# Altium PCB RUDR BOB PCB Jan 11th, 2025.PcbDoc
Units mm, origin at the board's own origin, x right, y up, seen from the top; angles counter-clockwise.
Board outline 79.75 x 100.58 mm, 2 copper layers (Top Layer, Bottom Layer); 62 components, 41 nets, 265 pads, 2 vias.
Unrouted connection lines stored in the file: 102.
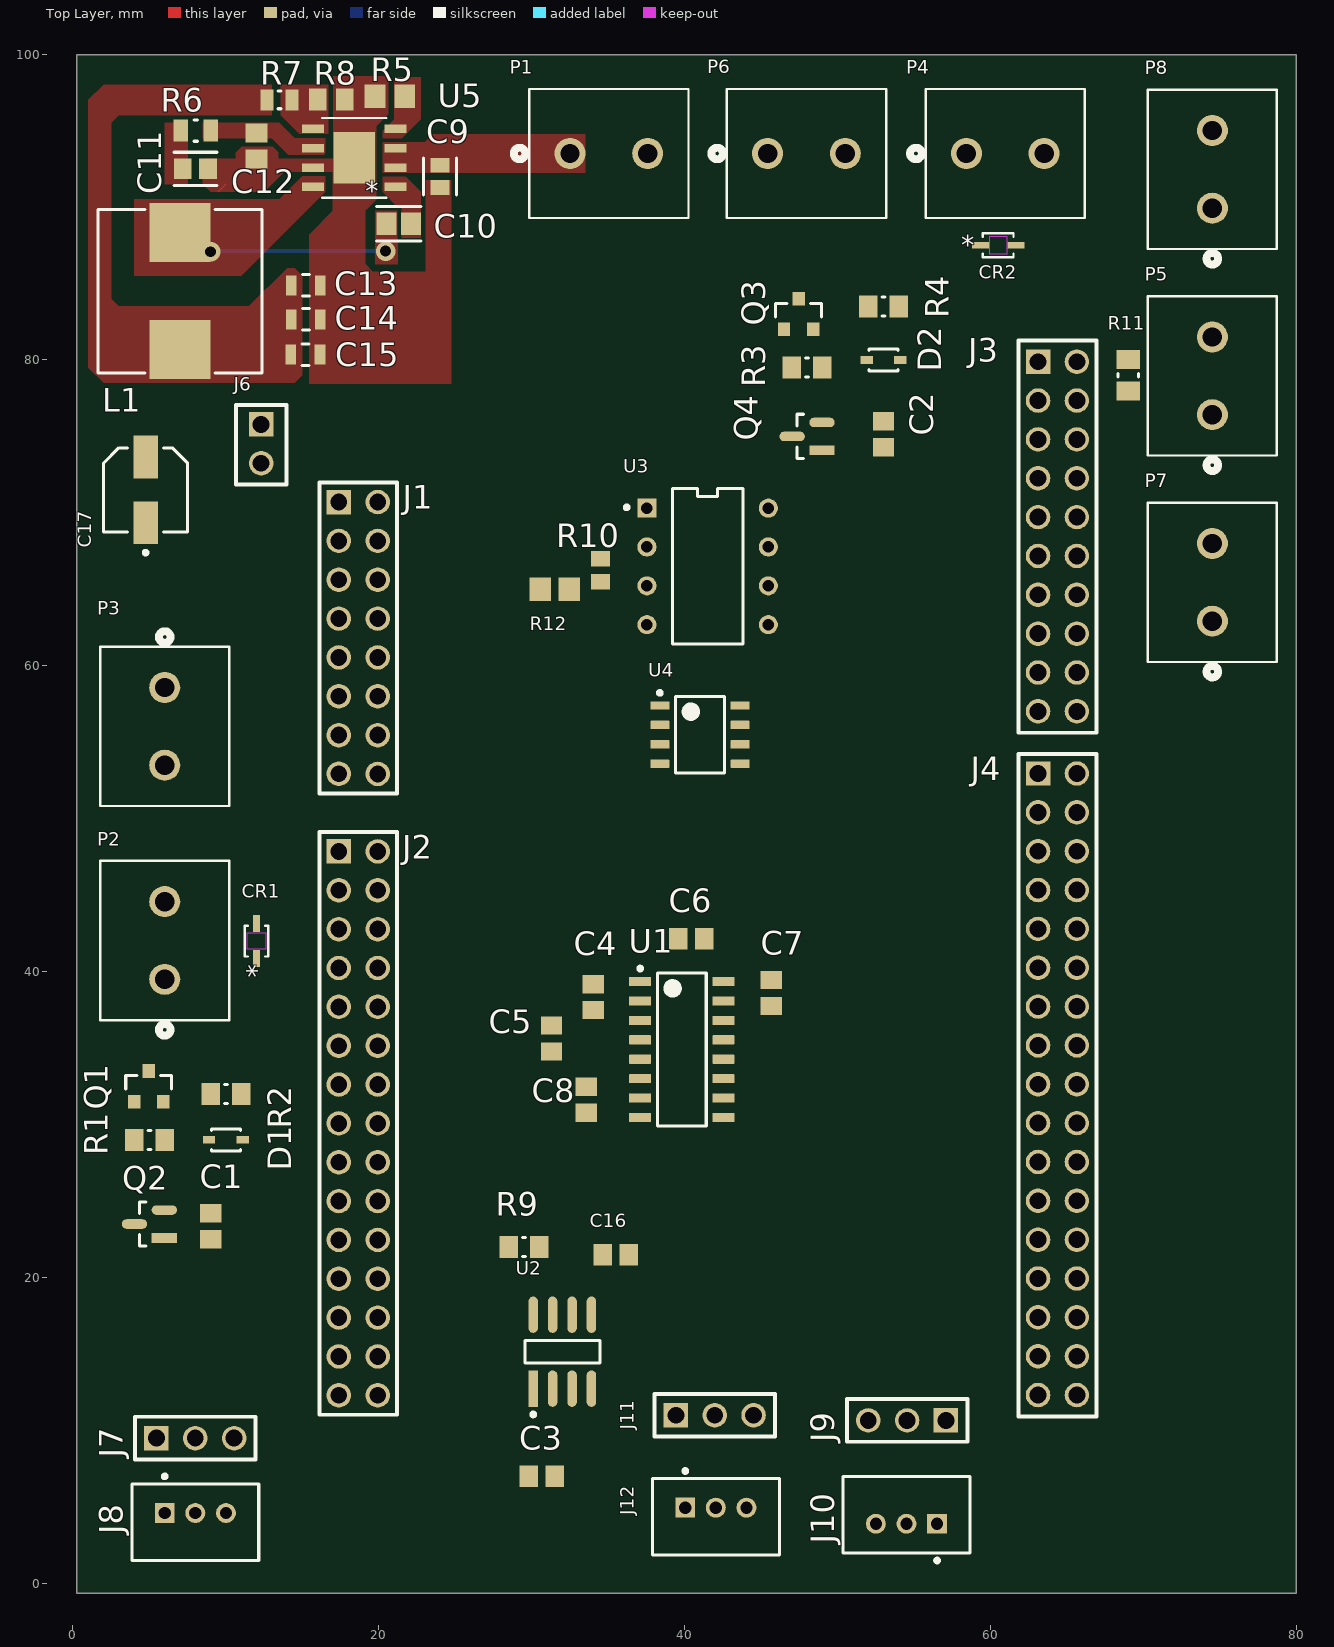
[diagram p0: Top Layer view]
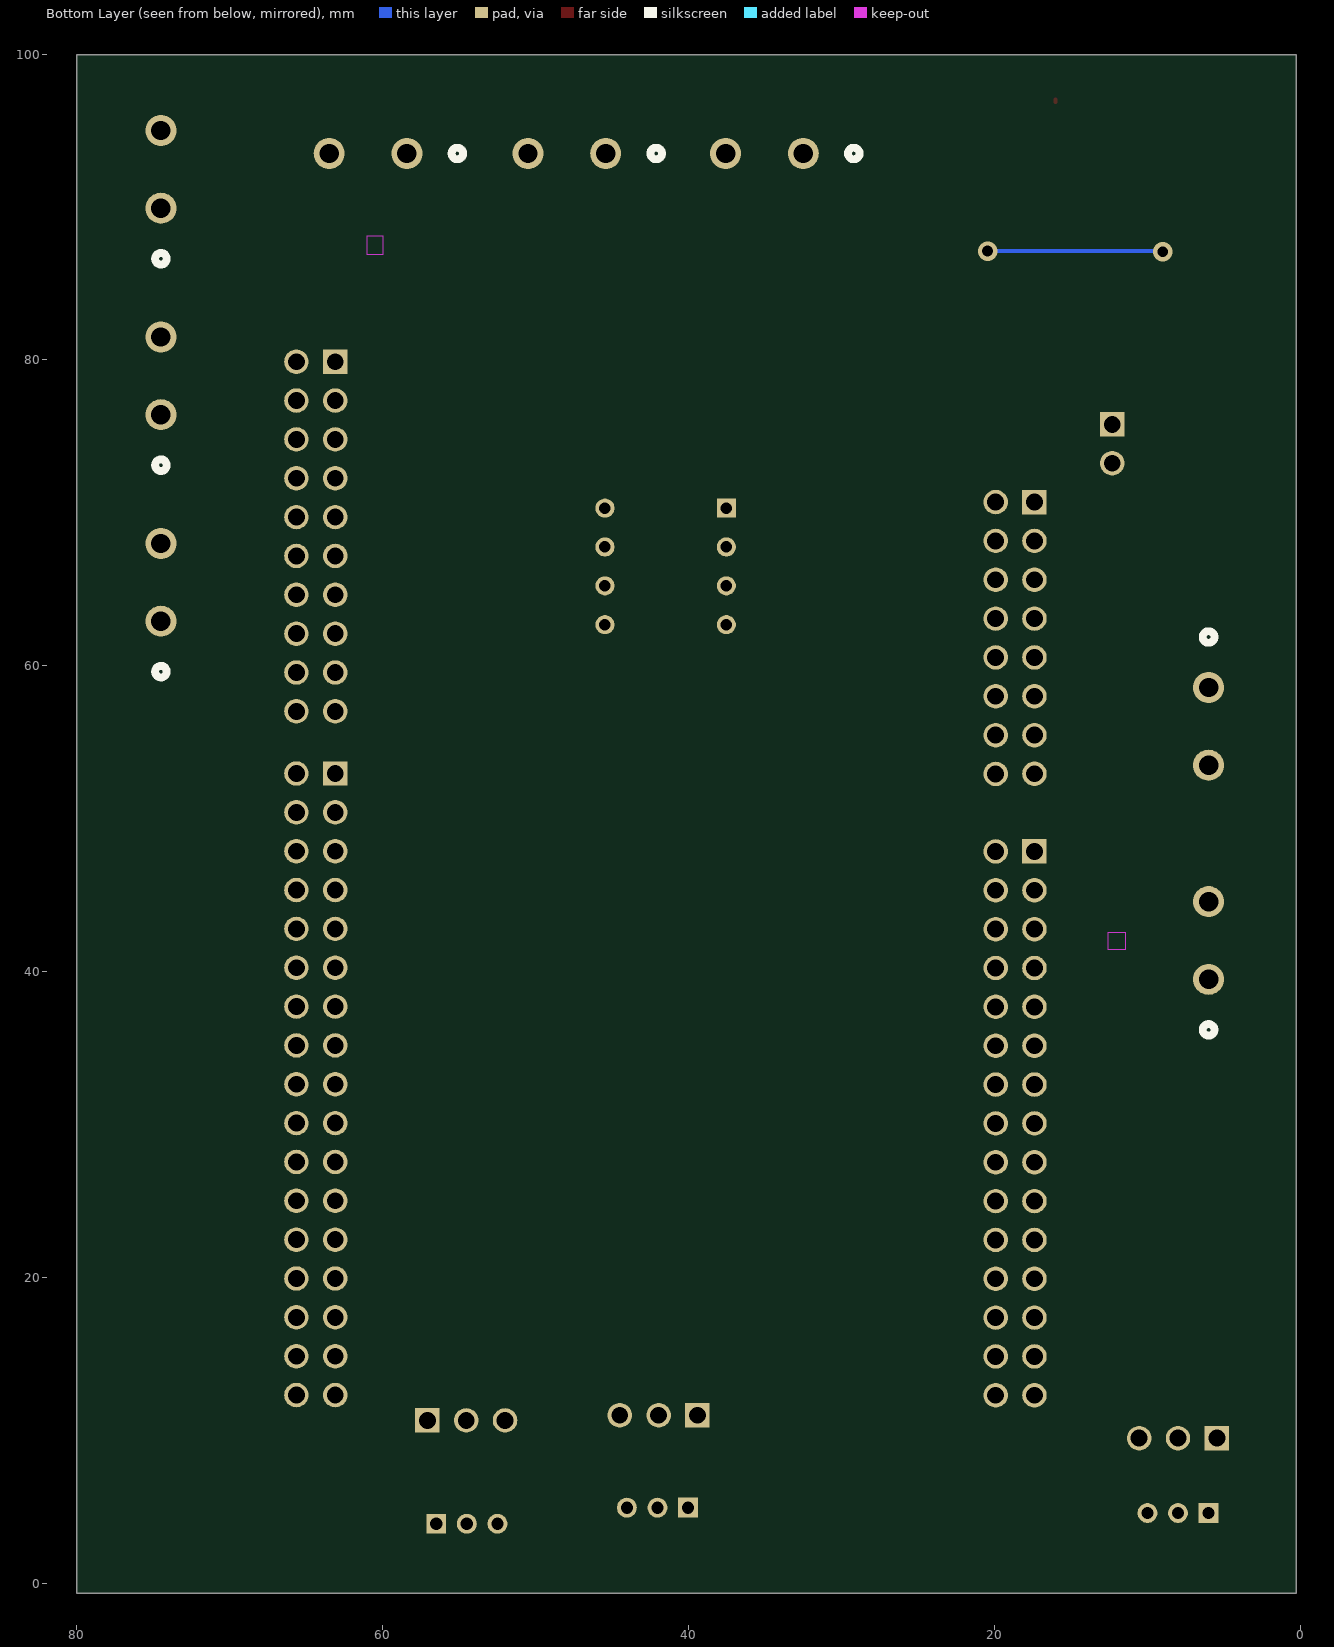
[diagram p1: Bottom Layer view, seen from below]

## Layer stack, top to bottom
Top Solder: solder mask 0.0102, Solder Resist, Dk 3.5
Top Layer: signal copper 0.0356
Dielectric 1: dielectric 0.32, FR-4, Dk 4.8
Bottom Layer: signal copper 0.0356
Bottom Solder: solder mask 0.0102, Solder Resist, Dk 3.5

## Board outline
0.254,-0.635 80,-0.635 80,99.949 0.254,99.949

## Design rules (kind name [scope] priority, off if disabled: settings)
Clearance [All] p1: gap=0.254 ignorepadtopadclearanceinfootprint=FALSE
PolygonConnect [All] p1: connectstyle=Direct reliefconductorwidth=0.254 reliefentries=4 polygonreliefangle="90 Angle" airgapwidth=0.254
RoutingVias [All] p1: holewidth=0.711 width=1.27 viastyle="Through Hole" minholewidth=0.711 minwidth=1.27 maxholewidth=0.711 maxwidth=1.27
SolderMaskExpansion [All] p1: expansion=0.102 istentingtop=FALSE
SupplyNets "Schematic Supply Nets_2" [InNet('GND')] p1: voltage=0.000
SupplyNets "Schematic Supply Nets_1" [InNet('5VIN')] p2: voltage=0.000
SupplyNets "Schematic Supply Nets" [InNet('12VIN')] p3: voltage=0.000
Width [All] p1: maxlimit=0.254 minlimit=0.254 preferedwidth=0.254
30 further rules are at their usual default settings.

## Classes and differential pairs
component class "MainBOB (RUDR) Jan 11th, 2025": * C1 C2 C3 C4 C5 C6 C7 C8 C16 C17 CR1 CR2 D1 D2 J1 J2 J3 J4 J6 J7 J8 J9 J10 J11 J12 P1 P2 P3 P4 P5 P6 P7 P8 Q1 Q2 Q3 Q4 R1 R2 R3 R4 R9 R10 R11 R12 U1 U2 U3 U4
component class "5V_BUCK (RUDR)": * C9 C10 C11 C12 C13 C14 C15 L1 R5 R6 R7 R8 U5

## Components (designator, comment, footprint, x,y, rotation, side; value= is the part's Value field where it differs from the comment)
C1 "0.47 uF" CAPC2013X135X45NL10T25 9,23.35 r270 top
C2 "0.47 uF" CAPC2013X135X45NL10T25 53,75.15 r270 top
C3 "0.1 uF" CAPC2013X135X45NL10T25 30.65,7 r180 top
C4 "0.1 uF" CAPC2013X135X45NL10T25 34.009,38.34 r90 top
C5 "0.47 uF" CAPC2013X135X45NL10T25 31.291,35.634 r90 top
C6 "0.47 uF" CAPC2013X135X45NL10T25 40.424,42.15 r0 top
C7 "0.1 uF" CAPC2013X135X45NL10T25 45.668,38.608 r90 top
C8 "0.47 uF" CAPC2013X135X45NL10T25 33.552,31.623 r90 top
C9 "10 uF" FP-GRM21B-0_1-IPC_C 24,92 r270 top
C10 "100 nF" FP-0805-L_2_01_0_2-W_1_25-IPC_B 21.292,88.898 r180 top
C11 "3.3 nF" FP-GRM216-0_1-IPC_B 8,92.5 r0 top
C12 "47 pF" CAPC2013X135X50NL15T20 12,94 r90 top
C13 "22 uF" FP-GRM21B-0_15-MFG 15.225,84.875 r0 top
C14 "22 uF" FP-GRM21B-0_15-MFG 15.225,82.65 r0 top
C15 "22 uF" FP-GRM21B-0_15-MFG 15.2,80.35 r0 top
C16 "0.1 uF" CAPC2013X135X45NL10T25 35.5,21.5 r0 top
C17 "10uF" FP-FKC-MFG 4.75,71.5 r90 top
CR1 "CUS10S30,H3FT" USC_TOS 12,42 r90 top
CR2 "CUS10S30,H3FT" USC_TOS 60.5,87.5 r0 top
D1 "CDSOD323-T05SC" FP-SOD-323-CA-MFG 10,29 r0 top
D2 "CDSOD323-T05SC" FP-SOD-323-CA-MFG 53,80 r180 top
J1 "CN8 CONN HDR 16POS" CN8_8X2_PADS 17.384,70.708 r0 top
J2 "CN9 CONN HDR 30POS" CN9_15X2_PADS 17.384,47.861 r0 top
J3 "CN7 CONN HDR 20POS" CN7_10X2_PADS 63.104,79.883 r0 top
J4 "CN10 CONN HDR 34POS" CN10_17X2_PADS 63.104,52.959 r0 top
J6 "5V_EXT" 5V_EXT 12.304,75.788 r0 top
J7 "CN 3PIN" "3X1 CON" 5.46,9.5 r90 top
J8 "440054-3" FP-440054-3-MFG 8,4 r180 top
J9 "CN 3PIN" "3X1 CON" 57.081,10.659 r270 top
J10 "440054-3" FP-440054-3-MFG 54.5,4.5 r0 top
J11 "CN 3PIN" "3X1 CON" 39.42,11 r90 top
J12 "440054-3" FP-440054-3-MFG 42.035,4.354 r180 top
L1 "5.5 uH" WE-HCI_1050 7,84.5 r0 top
P1 "282837-2" 282837-2_TYC 32.5,93.5 r0 top
P2 "282837-2" 282837-2_TYC 6,39.5 r90 top
P3 "282837-2" 282837-2_TYC 6,58.58 r270 top
P4 "282837-2" 282837-2_TYC 58.42,93.5 r0 top
P5 "282837-2" 282837-2_TYC 74.5,76.42 r90 top
P6 "282837-2" 282837-2_TYC 45.42,93.5 r0 top
P7 "282837-2" 282837-2_TYC 74.5,62.92 r90 top
P8 "282837-2" 282837-2_TYC 74.5,89.92 r90 top
Q1 "DMG2301L-7" FP-SOT23-MFG 4.95,32.5 r90 top
Q2 "MMBT3904-7-F" FP-SOT23-IPC_A 5,23.5 r180 top
Q3 "DMG2301L-7" FP-SOT23-MFG 47.45,83 r90 top
Q4 "MMBT3904-7-F" FP-SOT23-IPC_A 48,75 r180 top
R1 "200k" RESC2013X60X35ML10T20 5,29 r180 top
R2 "200k" RESC2013X60X35ML10T20 10,32 r0 top
R3 "200k" RESC2013X60X35ML10T20 48,79.5 r180 top
R4 "200k" RESC2013X60X35ML10T20 53,83.5 r0 top
R5 "200k" RESC2013X70X40ML20T20 20.725,97.25 r0 top
R6 "14k" FP-CRCW0805-e3-MFG 8.025,95 r180 top
R7 "115k" RESC2013X50X30LL20T20 13.5,97 r180 top
R8 "22.1k" RESC2013X70X40NL20T20 16.891,97.026 r180 top
R9 "120" RESC2013X60X35ML10T20 29.5,22 r0 top
R10 "10K" RESC2013X60X40LL20T25_A 34.5,66.25 r270 top
R11 "CRCW08055K00FKTA" RESC2013X50X30ML20T20 69,79 r90 top
R12 "22k" RESC2013X60X40ML20T25 31.5,65 r0 top
U1 "MAX3232EIDR" D0016A_N 39.808,34.911 r0 top
U2 "MCP2562FDT-H/SN" FP-C04-057-SN-IPC_A 31.998,15.156 r90 top
U3 "LM311P" FP-P0008A-MFG 41.5,66.5 r0 top
U4 "UA741CDR" D0008A_L 41,55.5 r0 top
U5 "AP64350SP-13" SO-8EP_DIO 18.39,93.216 r180 top

## Footprints (in the part's own frame and the unit in brackets; to place one, negate y for a bottom-side part, rotate by r counter-clockwise, add the part's x,y. Pads: shape width x height; smd on the part's side, far side on the other; paste and mask are expansions set on the pad)
"3X1 CON" [mm]
  rect 1.6x1.6 hole 1.1: 1(0,0)
  round 1.6 hole 1.1: 2(0,-2.54) 3(0,-5.08)
  silkscreen extent -1.4,-6.48 1.4,1.4
5V_EXT [mm]
  rect 1.6x1.6 hole 1.1: 1(0,0)
  round 1.6 hole 1.1: 2(0,-2.54)
  silkscreen extent -1.65,-3.94 1.65,1.27
282837-2_TYC [mil]
  round 80 / inner round 60 / far side round 80 hole 50 paste-99999 mask-40: 1(0,0) 2(200,0)
  silkscreen extent -145,-166 305,166
CAPC2013X135X45NL10T25 [mm] "Chip Capacitor, 2-Leads, Body 2.10x1.35mm, IPC Medium Density"
  rect 1.2x1.4 smd: 1(-0.85,0) 2(0.85,0)
  body extent -1.05,-0.67 1.05,0.67, height 1.35
CAPC2013X135X50NL15T20 [mm] "Chip Capacitor, 2-Leads, Body 2.00x1.25mm, IPC Medium Density"
  rect 1.25x1.45 smd: 1(-0.85,0) 2(0.85,0)
  body extent -1.08,-0.7 1.07,0.7, height 1.35
CN7_10X2_PADS [mm]
  rect 1.6x1.6 hole 1.1: 1(0,0)
  round 1.6 hole 1.1: 2(2.54,0) 3(0,-2.54) 4(2.54,-2.54) 5(0,-5.08) 6(2.54,-5.08) 7(0,-7.62) 8(2.54,-7.62) 9(0,-10.16) 10(2.54,-10.16) 11(0,-12.7) 12(2.54,-12.7) 13(0,-15.24) 14(2.54,-15.24) 15(0,-17.78) 16(2.54,-17.78) 17(0,-20.32) 18(2.54,-20.32) 19(0,-22.86) 20(2.54,-22.86)
  silkscreen extent -1.27,-24.26 3.81,1.4
CN8_8X2_PADS [mm]
  rect 1.6x1.6 hole 1.1: 1(0,0)
  round 1.6 hole 1.1: 2(2.54,0) 3(0,-2.54) 4(2.54,-2.54) 5(0,-5.08) 6(2.54,-5.08) 7(0,-7.62) 8(2.54,-7.62) 9(0,-10.16) 10(2.54,-10.16) 11(0,-12.7) 12(2.54,-12.7) 13(0,-15.24) 14(2.54,-15.24) 15(0,-17.77) 16(2.54,-17.78)
  silkscreen extent -1.27,-19.05 3.81,1.27
CN9_15X2_PADS [mm]
  rect 1.6x1.6 hole 1.1: 1(0,0)
  round 1.6 hole 1.1: 2(2.54,0) 3(0,-2.54) 4(2.54,-2.54) 5(0,-5.08) 6(2.54,-5.08) 7(0,-7.62) 8(2.54,-7.62) 9(0,-10.16) 10(2.54,-10.16) 11(0,-12.7) 12(2.54,-12.7) 13(0,-15.24) 14(2.54,-15.24) 15(0,-17.78) 16(2.54,-17.78) 17(0,-20.32) 18(2.54,-20.32) 19(0,-22.86) 20(2.54,-22.86) 21(0,-25.4) 22(2.54,-25.4) 23(0,-27.94) 24(2.54,-27.94) 25(0,-30.48) 26(2.54,-30.48) 27(0,-33.02) 28(2.54,-33.02) 29(0,-35.56) 30(2.54,-35.56)
  silkscreen extent -1.27,-36.83 3.81,1.27
CN10_17X2_PADS [mm]
  rect 1.6x1.6 hole 1.1: 1(0,0)
  round 1.6 hole 1.1: 2(2.54,0) 3(0,-2.54) 4(2.54,-2.54) 5(0,-5.08) 6(2.54,-5.08) 7(0,-7.62) 8(2.54,-7.62) 9(0,-10.16) 10(2.54,-10.16) 11(0,-12.7) 12(2.54,-12.7) 13(0,-15.24) 14(2.54,-15.24) 15(0,-17.78) 16(2.54,-17.78) 17(0,-20.32) 18(2.54,-20.32) 19(0,-22.86) 20(2.54,-22.86) 21(0,-25.4) 22(2.54,-25.4) 23(0,-27.94) 24(2.54,-27.94) 25(0,-30.48) 26(2.54,-30.48) 27(0,-33.02) 28(2.54,-33.02) 29(0,-35.56) 30(2.54,-35.56) 31(0,-38.1) 32(2.54,-38.1) 33(0,-40.64) 34(2.54,-40.64)
  silkscreen extent -1.27,-42.04 3.81,1.27
D0008A_L [mm] "SOIC, 8-Leads, Body 5x4mm, Pitch 1.27mm, IPC High Density"
  rrect18% 1.25x0.55 smd: 1(-2.625,1.905) 2(-2.625,0.635) 3(-2.625,-0.635) 4(-2.625,-1.905) 5(2.625,-1.905) 6(2.625,-0.635) 7(2.625,0.635) 8(2.625,1.905)
  silkscreen extent -2.75,-2.5 1.6,2.85, body extent -3,-2.45 3,2.45, height 1.63
D0016A_N [mm] "SOIC, 16-Leads, Body 10x4mm, Pitch 1.27mm, IPC Medium Density"
  rrect17% 1.45x0.6 smd: 1(-2.725,4.445) 2(-2.725,3.175) 3(-2.725,1.905) 4(-2.725,0.635) 5(-2.725,-0.635) 6(-2.725,-1.905) 7(-2.725,-3.175) 8(-2.725,-4.445) 9(2.725,-4.445) 10(2.725,-3.175) 11(2.725,-1.905) 12(2.725,-0.635) 13(2.725,0.635) 14(2.725,1.905) 15(2.725,3.175) 16(2.725,4.445)
  silkscreen extent -2.85,-5 1.6,5.42, body extent -3,-4.95 3,4.95, height 1.59
FP-0805-L_2_01_0_2-W_1_25-IPC_B [mm]
  rect 1.305x1.456 smd paste+0 mask+0: 1(-0.806,0) 2(0.806,0)
  silkscreen extent -1.46,-1.13 1.46,1.13, body extent -1.71,-0.98 1.71,0.98, height 0.25
FP-440054-3-MFG [mm]
  rect 1.3x1.3 hole 0.8 paste-2539.97 mask+0: 1(2,-0.6)
  round 1.3 hole 0.8 paste-2539.97 mask+0: 2(0,-0.6) 3(-2,-0.6)
  silkscreen extent -4.15,-3.12 4.15,2.5, body extent -4.25,-2.6 4.25,2.6, height 0.25
FP-C04-057-SN-IPC_A [mm]
  rect 2.377x0.622 smd paste+0 mask+0: 1(-2.418,1.905)
  rrect100% 2.377x0.622 smd paste+0 mask+0: 2(-2.418,0.635) 3(-2.418,-0.635) 4(-2.418,-1.905) 5(2.418,-1.905) 6(2.418,-0.635) 7(2.418,0.635) 8(2.418,1.905)
  silkscreen extent -4.23,-2.45 0.73,2.45, body extent -4.11,-2.95 4.11,2.95, height 0.25
FP-CRCW0805-e3-MFG [mm]
  rect 0.95x1.45 smd paste+0 mask+0: 1(-0.975,0) 2(0.975,0)
  silkscreen extent -0.13,-0.7 0.13,0.7, body extent -1.55,-0.82 1.55,0.82, height 0.25
FP-FKC-MFG [mm]
  rect 2.8x1.6 smd paste+0 mask+0: 1(-2.15,0) 2(2.15,0)
  silkscreen extent -4.22,-2.75 2.75,2.75, body extent -3.8,-3 3.8,3, height 0.25
FP-GRM21B-0_1-IPC_C [mm]
  rect 0.958x1.262 smd paste+0 mask+0: 1(-0.727,0) 2(0.727,0)
  silkscreen extent -1.21,-1.07 1.21,1.07, body extent -1.31,-0.77 1.31,0.77, height 0.25
FP-GRM21B-0_15-MFG [mm]
  rect 0.7x1.3 smd paste+0 mask+0: 1(-0.95,0) 2(0.95,0)
  silkscreen extent -0.23,-0.7 0.23,0.7, body extent -1.4,-0.8 1.4,0.8, height 0.25
FP-GRM216-0_1-IPC_B [mm]
  rect 1.158x1.361 smd paste+0 mask+0: 1(-0.827,0) 2(0.827,0)
  silkscreen extent -1.41,-1.08 1.41,1.08, body extent -1.66,-0.93 1.66,0.93, height 0.25
FP-P0008A-MFG [mm]
  rect 1.25x1.25 hole 0.75 paste-2539.97 mask+0: 1(-3.97,3.81)
  round 1.25 hole 0.75 paste-2539.97 mask+0: 2(-3.97,1.27) 3(-3.97,-1.27) 4(-3.97,-3.81) 5(3.97,-3.81) 6(3.97,-1.27) 7(3.97,1.27) 8(3.97,3.81)
  silkscreen extent -5.42,-5.08 2.3,5.08, body extent -4.69,-5.18 4.69,5.18, height 0.25
FP-SOD-323-CA-MFG [mm]
  rect 0.8x0.5 smd paste+0 mask+0: 1(-1.1,0) 2(1.1,0)
  silkscreen extent -0.95,-0.72 0.95,0.72, body extent -1.6,-0.82 1.6,0.82, height 0.25
FP-SOT23-IPC_A [mm]
  rect 1.659x0.627 smd paste+0 mask+0: 1(-0.977,0.915)
  rrect100% 1.659x0.627 smd paste+0 mask+0: 2(-0.977,-0.915) 3(0.977,0)
  silkscreen extent 0.23,-1.45 0.65,1.45, body extent -2.31,-1.95 2.31,1.95, height 0.25
FP-SOT23-MFG [mm]
  rect 0.9x0.8 smd paste+0 mask+0: 1(-1,0.95) 2(-1,-0.95) 3(1,0)
  silkscreen extent -0.18,-1.5 0.7,1.5, body extent -1.55,-1.6 1.55,1.6, height 0.25
RESC2013X50X30LL20T20 [mm] "Chip Resistor, 2-Leads, Body 2.00x1.25mm, IPC High Density"
  rect 0.85x1.35 smd: 1(-0.825,0) 2(0.825,0)
  silkscreen extent -0.1,-0.58 0.1,0.58, body extent -1.1,-0.72 1.1,0.72, height 0.5
RESC2013X50X30ML20T20 [mm] "Chip Resistor, 2-Leads, Body 2.00x1.25mm, IPC Low Density"
  rect 1.25x1.55 smd: 1(-1.025,0) 2(1.025,0)
  silkscreen extent -0.1,-0.67 0.1,0.67, body extent -1.1,-0.72 1.1,0.72, height 0.5
RESC2013X60X35ML10T20 [mm] "Chip Resistor, 2-Leads, Body 2.1x1.35mm, IPC Low Density"
  rect 1.2x1.45 smd: 1(-1,0) 2(1,0)
  silkscreen extent -0.1,-0.63 0.1,0.63, body extent -1.05,-0.68 1.05,0.67, height 0.6
RESC2013X60X40LL20T25_A [mm] "Chip Resistor, 2-Leads, Body 2.20x1.35mm, IPC High Density"
  rect 1x1.25 smd: 1(-0.75,0) 2(0.75,0)
  body extent -1.1,-0.67 1.1,0.67, height 0.6
RESC2013X60X40ML20T25 [mm] "Chip Resistor, 2-Leads, Body 2.00x1.25mm, IPC Low Density"
  rect 1.4x1.55 smd: 1(-0.95,0) 2(0.95,0)
  body extent -1.1,-0.72 1.1,0.72, height 0.6
RESC2013X70X40ML20T20 [mm] "Chip Resistor, 2-Leads, Body 2.00x1.25mm, IPC Low Density"
  rect 1.35x1.55 smd: 1(-0.975,0) 2(0.975,0)
  body extent -1.1,-0.72 1.1,0.72, height 0.7
RESC2013X70X40NL20T20 [mm] "Chip Resistor, 2-Leads, Body 2.00x1.25mm, IPC Medium Density"
  rect 1.15x1.45 smd: 1(-0.875,0) 2(0.875,0)
  body extent -1.1,-0.72 1.1,0.72, height 0.7
SO-8EP_DIO [mil]
  rect 56x22 smd paste+0 mask+0: 1(-106,75) 2(-106,25) 3(-106,-25) 4(-106,-75) 5(106,-75) 6(106,-25) 7(106,25) 8(106,75)
  rect 107x132 smd paste-65.5 mask+0: EPAD(0,0)
  silkscreen extent -83,-103 83,103, body extent -120,-97 120,97, height 64
USC_TOS [mm]
  rect 1.111x0.451 smd paste+0 mask+0: 1(-1.15,0) 2(1.15,0)
  Keep-Out Layer region: -0.544,-0.599 -0.544,0.599 0.544,0.599 0.544,-0.599
  silkscreen extent -1,-0.78 1,0.78, body extent -1.35,-0.65 1.35,0.65, height 1.1
WE-HCI_1050 [mm] "SMT Flat Wire High Current Inductor, body 10.2x10.2mm"
  rect 4x3.85 smd: 1(0,3.825) 2(0,-3.825)
  silkscreen extent -5.35,-5.35 5.35,5.35, body extent -5.1,-5.5 5.1,5.5, height 5

## Part data
C1 C2 C3 C4 C5 C6 C7 C8 C16: library part CMP-1662-00015-2, "Chip Capacitor, 4.7 uF, +/- 10%, 16 V, -55 to 85 degC, 0805 (2012 Metric), RoHS, Tape and Reel", Capacitance="4.7 uF", Case Code (Imperial)=0805, Case Code (Metric)=2012, Max Operating Temperature="85 degC", Min Operating Temperature="-55 degC", Package Quantity=3000, PartNumber=GRM21BR61C475KA88L, Tolerance=10%, Type (Capacitors)=X5R, Voltage Rating="16 V", Case\/Package=0805, ComponentLink1Description="Manufacturer URL", ComponentLink1URL=http://www.murata.com/, ComponentLink2Description=Datasheet, ComponentLink2URL=http://search.murata.co.jp/Ceramy/image/img/A01X/G101/ENG/GRM21BR61C475KA88-01.pdf, DatasheetVersion=03/2016, Height="1.25 mm", Length="2 mm", Mount="Surface Mount", Mounting Technology="Surface Mount", PackageDescription="2-Pin Surface Mount Device, Body 2 x 1.25 mm", PackageReference=0805, Packaging="Tape and Reel", Pins=2, Radiation Hardening=No, REACH SVHC="No SVHC", RoHSCompliant=true, Voltage Rating (DC)="16 V", Width="1.25 mm"
C9: library part CMP-2007-03453-2, "Chip Multilayer Ceramic Capacitors for General Purpose, 0805, 10uF, X5R, 15%, 10%, 16V", Capacitance=10uF, Case Code (Imperial)=0805, Case Code (Metric)=2012, Dielectric=X5R, Max Operating Temperature=85°C, Min Operating Temperature=-55°C, Package Quantity=1, Tolerance=10%, Voltage=16V, Case/Package=0805, Depth=1.25mm, Height=1.25mm, Lead Free="Lead Free", Length=2mm, Material=Ceramic, Mount="Surface Mount", Packaging="Tape and Reel", Radiation Hardening=No, REACH SVHC="No SVHC", Termination=SMD/SMT, Thickness=0.053inch, Voltage Rating=16V, Voltage Rating (DC)=16V, Width=1.25mm
C10: library part CMP-2007-04172-2, "Automotive Ceramic Capacitor, 0805, 100nF, 10%, X7R, 15%, 100V", Capacitance=100nF, Case Code (Imperial)=0805, Case Code (Metric)=2012, Dielectric=X7R, Dielectric Material=Ceramic, Max Operating Temperature=125°C, Min Operating Temperature=-55°C, Package Quantity=1, Ratings=AEC-Q200, Tolerance=10%, Voltage=100V, Case/Package=0805, Construction=Flat, Depth=1.25mm, Height=1.4mm, Lead Free="Lead Free", Length=2.01mm, Mount="Surface Mount", Number of Pins=2, Packaging="Tape and Reel", Radiation Hardening=No, REACH SVHC="No SVHC", RoHS Compliant=Yes, Series=-, Termination=SMD/SMT, Thickness=0.055inch, Voltage Rating=100V, Voltage Rating (DC)=100V, Width=0.049inch
C11: library part CMP-2007-00889-2, "Chip Multilayer Ceramic Capacitors for General Purpose, 0805, 3300pF, C0G, 30ppm/°C, 5%, 50V", Capacitance=3.3nF, Case Code (Imperial)=0805, Case Code (Metric)=2012, Dielectric=C0G, Dielectric Material=Ceramic, Insulation Resistance=10GR, Max Operating Temperature=125°C, Min Operating Temperature=-55°C, Package Quantity=1, Temperature Coefficient=30ppm/°C, Tolerance=5%, Voltage=50V, Case/Package=0805, Construction=Flat, Depth=1.25mm, Height=0.6mm, Lead Free="Lead Free", Length=2mm, Material=Ceramic, Mount="Surface Mount", Number of Pins=2, Packaging="Tape and Reel", REACH SVHC="No SVHC", RoHS Compliant=Yes, Series=GRM, Size=0.6mm, Termination=SMD/SMT, Thickness=0.028inch, Voltage Rating=50V, Voltage Rating (DC)=50V, Width=0.049inch
C12: library part CMP-1036-01617-2, Manufacturer=Vitramon, Part Number=VJ0805A470JXACW1BC
C13 C14 C15: library part CMP-2007-03385-2, "Chip Multilayer Ceramic Capacitors for General Purpose, 0805, 22uF, X5R, 15%, 20%, 6.3V", Capacitance=22uF, Case Code (Imperial)=0805, Case Code (Metric)=2012, Dielectric=X5R, Max Operating Temperature=85°C, Min Operating Temperature=-55°C, Package Quantity=1, Tolerance=20%, Voltage=6.3V, Case/Package=0805, Depth=1.25mm, Height=1.25mm, Lead Free="Lead Free", Length=2mm, Material=Ceramic, Mount="Surface Mount", Packaging="Tape and Reel", Radiation Hardening=No, REACH SVHC="No SVHC", Termination=SMD/SMT, Thickness=0.053inch, Voltage Rating=6.3V, Voltage Rating (DC)=6.3V, Width=0.049inch
C17: library part CMP-05427-000030-1, "CAP ALUM 10UF 20% 50V SMD", Case/Package=Radial, Dielectric Material=Aluminium, ESR (Equivalent Series Resistance)=1.52R, Leakage Current=3uA, Max Operating Temperature=105°C, Min Operating Temperature=-55°C, Package Quantity=1000, Ripple Current=85mA, Tolerance=20%, Voltage=50V, Capacitance=10uF, Construction=Cylindrical, Contact Plating=Tin, Diameter=5mm, Height=5.8mm, Height - Seated (Max)=0.228inch, Impedance=1.52R, Lead Free="Lead Free", Length=5.8mm, Life (Hours)=2000Hour, Material=Aluminium, Mount="Surface Mount", Number of Pins=2, Packaging="Tape and Reel", Radiation Hardening=No, REACH SVHC="No SVHC", Ripple Current (AC)=85mA, RoHS Compliant=Yes, Series=FK, Termination=SMD/SMT, Voltage Rating=50V, Voltage Rating (DC)=50V, Width=6.5mm
CR1 CR2: "No Description Available", Mfr_Name="Toshiba Electronic Devices & Storage Corp."
D1 D2: library part CMP-07401-000040-1, "TVS DIODE 5VWM 14.5VC SOD323", Breakdown Voltage=6V, Capacitance=350pF, Clamping Voltage=13.5V, Leakage Current=10uA, Max Operating Temperature=150°C, Max Power Dissipation=400W, Max Surge Current=28A, Min Operating Temperature=-55°C, Operating Supply Voltage=5V, Package Quantity=3000, Peak Pulse Power=500W, Power Line Protection=No, Resistor Type=Zener, Test Current=1mA, Contact Plating=Tin, Depth=1.45mm, Diode Type=ZENER, Direction=Bidirectional, Element Configuration=Single, Length=1.9mm, Max Breakdown Voltage=6V, Min Breakdown Voltage=6V, Mount="Surface Mount", Number of Bidirectional Channels=1, Number Of Channels=1, Number of Elements=1, Number of Pins=2, Packaging="Tape and Reel", Peak Pulse Current=28A, Polarity=Bidirectional, Radiation Hardening=No, REACH SVHC="No SVHC", Reverse Breakdown Voltage=6V, Reverse Standoff Voltage=5V, RoHS Compliant=Yes, Series=CDSOD323, Termination=SMD/SMT, Working Voltage=5V
J1: "CN8 CONN HDR 16POS 0.1 STACK"
J2: "CN9 CONN HDR 30 POS  0.1 STACK"
J3: "CN7 CONN HDR 20 POS  0.1 STACK"
J4: "CN10 CONN HDR 34 POS  0.1 STACK"
J8 J10 J12: library part CMP-03369-000008-1, "CONN HEADER VERT 3POS 2MM", Current Rating=3A, Manufacturer="TE Connectivity", Package=0, Temperature="-25°C to +105°C", Temperature Range High=+105°C, Temperature Range Low=-25°C, Voltage Rating=250V, Automotive=No, Category=Conn, ComponentLink2Description=Datasheet, ComponentLink2URL=https://www.te.com/usa-en/product-440054-3.datasheet.pdf, Conn Gender=Male, Conn Orientation=Vertical, Contact Material=Tin,Nickel, Device Class L1=Connectors, Device Class L2="Headers and Wire Housings", Device Class L3=unset, Digikey Description="CONN HEADER VERT 3POS 2MM", Footprint Url=https://www.te.com/commerce/DocumentDelivery/DDEController?Action=showdoc&DocId=Customer+Drawing%7F440054%7FF6%7Fpdf%7FEnglish%7FENG_CD_440054_F6.pdf%7F440054-3, Height=6.35mm, Lead Free=Yes, Manufacturer Part Number=440054-3, Mouser Description="Headers & Wire Housings 3 POS HDR VERT 2.0mm", Number Of Contacts=3, Number Of Rows=1, Octopart=https://octopart.com/440054-3-te+connectivity-40394845, Pitch=2mm, RoHS=TRUE
L1: library part CMP-0226-00138-2, Ambient Temperature Range High=100°C, Ambient Temperature Range Low=-40°C, Case/Package=1050, Current Rating=10A, DC Resistance (DCR)=10.3mΩ, Inductance=5.5µH, Inductance Tolerance=20%, Max Operating Temperature=150°C, Saturation Current=12A, Self Resonant Frequency=30MHz, Series Resistance=10.3Ω, Test Frequency=100kHz, Composition=Wirewound, Depth=10.2mm, Height=4.7mm, Height - Seated (Max)=5.0038mm, Lead Free="Lead Free", Length=10.5mm, Max DC Current=10A, Min Operating Temperature=-40°C, Mount="Surface Mount", NexarPartId=7866439, Number of Pins=2, Packaging="Cut Tape (CT)", REACH SVHC=Unknown, Resistance=10.3mΩ, RMS Current (Irms)=10A, RoHS=Compliant, Shielding=Shielded, Termination=SMD/SMT, Tolerance=20%, Width=10.2mm
P1 P2 P3 P4 P5 P6 P7 P8: "No Description Available", Mfr_Name="TE Connectivity", RefDes=RefDes, Type=Type
Q1 Q3: library part CMP-12801-000065-1, "MOSFET P-CH 20V 3A SOT23", Continuous Drain Current=-3A, Drain To Source Breakdown Voltage=-20V, Drain to Source Resistance=120mΩ, Gate To Source Voltage=8V, Input Capacitace At Vds="476pF @ -10V", Manufacturer="Diodes Inc.", Max Forward Diode Voltage=-1.2V, Max Junction Temp=+150°C, Package=SOT23, Power Dissipation=1.5W, Pulse Drain Current=-10A, Temperature="-55°C to +150°C", Temperature Range Low=-55°C, Automotive=No, Category=Trans, ComponentLink2Description=Datasheet, ComponentLink2URL=https://www.diodes.com/assets/Datasheets/DMG2301L.pdf, Depletion Mode=False, Device Class L1="Discrete Semiconductors", Device Class L2=Transistors, Device Class L3=MOSFETs, Digikey Description="MOSFET P-CH 20V 3A SOT23", Drain To Source Voltage=-20V, Footprint Url=https://www.diodes.com/assets/Package-Files/SOT23.pdf, Gate Charge At Vgs="5.5nC @ -4.5V", Height=1.1mm, Lead Free=Yes, Manufacturer Part Number=DMG2301L-7, Mouser Description="Single P-Channel 20 V 1.5 W 5.5 nC Silicon Surface Mount Mosfet - SOT-23", Number Of Channels=1, Number Of P Channels=1, Octopart=https://octopart.com/dmg2301l-7-diodes+inc.-67250456, RoHS=TRUE, Rthja Max=83°C/W, Standoff Height=0.013mm, Temperature Range High=+150°C, Threshold Vgs Max=-1.2V, Threshold Vgs Min=-0.4V, Turn Off Delay Time=30ns, Turn On Delay Time=5ns
Q2 Q4: library part CMP-2000-04931-2, "TRANS NPN 40V 0.2A SMD SOT23-3", Case/Package=SOT-23, Collector Base Voltage (VCBO)=60V, Collector Emitter Breakdown Voltage=40V, Collector Emitter Saturation Voltage=300mV, Continuous Collector Current=200mA, Emitter Base Voltage (VEBO)=6V, Frequency=300MHz, Max Operating Temperature=150°C, Max Power Dissipation=300mW, Min Operating Temperature=-55°C, Package Quantity=3000, Power Dissipation=350mW, Collector Emitter Voltage (VCEO)=40V, Contact Plating=Tin, Element Configuration=Single, Gain Bandwidth Product=300MHz, Height=1mm, hFE Min=100, Lead Free="Lead Free", Length=3.05mm, Max Breakdown Voltage=40V, Max Collector Current=200mA, Max Frequency=300MHz, Mount="Surface Mount", Number of Elements=1, Number of Pins=3, Packaging="Tape and Reel", Polarity=NPN, Radiation Hardening=No, REACH SVHC="No SVHC", Transition Frequency=300MHz, Voltage Rating (DC)=40V, Weight=0.000282oz, Width=1.4mm
R1 R2 R3 R4 R9: library part CMP-2100-03671-1, "Chip Resistor, 1 KOhm, +/- 1%, 125 mW, -55 to 155 degC, 0805 (2012 Metric), RoHS, Tape and Reel", Case Code (Imperial)=0805, Case Code (Metric)=2012, Manufacturer=Yageo, Max Operating Temperature=155degC, Max Power Dissipation=125mW, Min Operating Temperature=-55degC, Package Description="2-Pin Surface Mounted Device, Body 2 x 1.25 mm", Package Quantity=1, Resistance=1KOhm, Temperature Coefficient=100ppm/degreesC, Tolerance=1%, Voltage Rating=150V, Case/Package=0805, Composition=ThickFilm, Datasheet URL=http://www.yageo.com/NewPortal/yageodocoutput?fileName=/pdf/R-Chip/PYu-RC_Group_51_RoHS_L_5.pdf, Datasheet Version="Rev. 5, 10/2016", Depth=1.25mm, Height=0.024inch, Lead Free=LeadFree, Length=0.079inch, Manufacturer URL=http://www.yageo.com/, Military Standard=Not, Number of Pins=2, Number of Terminations=2, Package Reference=0805, Packaging=TapeandReel, Power Rating=125mW, REACH SVHC=Unknown, RoHSCompliant=true, Termination=SMD/SMT, Voltage Rating (DC)=150V, Width=0.049inch
R5: library part CMP-2001-00372-1, Manufacturer=Panasonic, Part Number=ERJ-6GEYJ204V
R6: library part CMP-2001-04956-2, "RES Thick Film, 14kΩ, 1%, 0.125W, 100ppm/°C, 0805", Case Code (Imperial)=0805, Case Code (Metric)=2012, Max Operating Temperature=155°C, Max Power Dissipation=125mW, Min Operating Temperature=-55°C, Package Quantity=10, Resistance=14kR, Temperature Coefficient=100ppm/°C, Tolerance=1%, Voltage Rating=150V, Case/Package=0805, Composition="Thick Film", Contact Plating=Tin, Depth=1.25mm, Features="Automotive AEC-Q200", Height=0.45mm, Lead Free="Lead Free", Length=2mm, Military Standard=Not, Mount="Surface Mount", Number of Pins=2, Number of Terminations=2, Packaging="Tape and Reel", Power Rating=125mW, Radiation Hardening=No, Termination=SMD/SMT, Voltage Rating (DC)=150V, Weight=0.000194oz, Width=1.25mm, Working Voltage=150V
R7: library part CMP-2001-04921-1, Manufacturer="Vishay Dale", Part Number=CRCW0805115KFKEA
R8: library part CMP-2001-00049-1, Manufacturer=Panasonic, Part Number=ERJ-6ENF2212V
R10: library part CMP-2001-00582-2, "Metal Film Chip Resistor, High Reliability Type, 0.125 W, +/- 0.1%, -55 to 155 degC, 0805 (2012 Metric), RoHS, Tape and Reel", Case Code - in=0805, Case Code - mm=2012, Manufacturer=Panasonic, Operating Temperature Range=-55Cto+155C, Package / Case=0805(2012metric), Package Description="2-Pin Surface Mount Device, Body 2 x 1.25 mm", Power Rating=125mW(1/8W), Resistance=10kOhms, Temperature Coefficient=25PPM/C, Tolerance=0.1%, Voltage Rating=100V, Brand=Panasonic, Datasheet URL=https://industrial.panasonic.com/cdbs/www-data/pdf/RDM0000/AOA0000C307.pdf, Datasheet Version=02/2016, Factory Pack Quantity=5000, Height=0.5mm, Length=2mm, Manufacturer URL=http://www.panasonic.com/, Mounting Technology=SurfaceMount, Package Reference=0805, Packaging=Reel, Product=ThinFilmResistorsSMD, Product Category=ThinFilmResistors-SMD, RoHS=Details, Series=ERA-6A, Termination Style=SMD/SMT, Type=MetalFilmChipResistors, Width=1.25mm
R11: library part CMP-2001-04239-1, Manufacturer="Vishay Dale", Part Number=CRCW08055K00FKTA
R12: library part CMP-2001-00614-1, Manufacturer=Panasonic, Part Number=ERA6AEB223V
U1: library part CMP-0299-00792-2, "3-V to 5.5-V Multichannel RS-232 Line Driver / Receiver with ±15-kV IEC ESD Protection, -40 to 85 degC, 16-Pin SOIC (D), Green (RoHS & no Sb/Br)", Drivers Per Package=2, Supply Voltage(s)(V)="3.3 or 5.0", ComponentLink1Description="Manufacturer URL", ComponentLink1URL=www.ti.com, ComponentLink2Description=Datasheet, ComponentLink2URL=http://www.ti.com/general/docs/lit/getliterature.tsp?genericPartNumber=MAX3232E&fileType=pdf, ComponentLink3Description="Package Specification", ComponentLink3URL=http://www.ti.com/litv/pdf/mpds178g, DatasheetVersion=SLLS664A, ESD HBM(kV)=+/-15, ICC(Max)(mA)=1, IEC-61000-4-2 SUPPORT=TRUE, PackageDescription="16-Pin Plastic Small Outline Integrated Circuit, 9.9 x 3.9 mm, Pitch 1.27 mm Pitch", PackageReference=D0016A, PackageVersion="revM, Jun-2011", Receivers Per Package=2, RS-232=TRUE, Single Supply=TRUE, SubFamily=RS-232
U2: library part CMP-06279-000047-1, "IC TRANSCEIVER 1/1 8SOIC", Case/Package=SOIC, Max Operating Temperature=150°C, Max Supply Voltage=5.5V, Min Operating Temperature=-40°C, Min Supply Voltage=4.5V, Operating Supply Current=70mA, Package Quantity=3300, Data Rate=8Mbps, Mount="Surface Mount", Number of Pins=8, Number of Transceivers=1, Packaging="Tape and Reel", Receiver Hysteresis=200mV, RoHS Compliant=Yes, Series=-, Weight=0.019048oz
U3: library part CMP-1685-00016-2, Ambient Temperature Range High=70°C, Case Code (Imperial)=0603, Case Code (Metric)=1608, Case/Package=PDIP, Dual Supply Voltage=9V, Input Bias Current=250nA, Input Offset Voltage (Vos)=2mV, Manufacturer Lifecycle Status=ACTIVE, Max Dual Supply Voltage=15V, Max Junction Temperature (Tj)=150°C, Max Output Voltage=7.5mV, Max Power Dissipation=500mW, Max Supply Current=7.5mA, Max Supply Voltage=30V, Min Dual Supply Voltage=1.75V, Min Operating Temperature=0°C, Min Supply Voltage=3.5V, Operating Supply Voltage=28V, Output Current=50mA, Power Rating=100mW, Resistance=390Ω, Tolerance=1%, Voltage Gain=106.02dB, Voltage Rating=75V, Contact Plating=Gold, Height=5.08mm, Lead Free="Lead Free", Length=9.81mm, Lifecycle Status=Production, Max Input Current=250nA, Max Operating Temperature=70°C, Mount="Surface Mount, Through Hole", NexarPartId=24336, Nominal Supply Current=7.5mA, Number Of Channels=1, Number Of Circuits=1, Number of Elements=1, Number of Pins=8, Output Current per Channel=50mA, Output Type=TTL, Packaging="Tape and Reel", Propagation Delay=115ns, Quiescent Current=7.5mA, Radiation Hardening=No, REACH SVHC="No SVHC", Response Time=165ns, RoHS=Compliant, Schedule B="8542390000, 8542390000", Thickness=3.9mm, Turn-On Delay Time=115ns, Type="General Purpose", Weight=2.012816mg, Width=6.35mm
U4: library part CMP-0017-00239-2, "General-Purpose Operational Amplifier, 7 to 36 V, 0 to 70 degC, 8-pin SOIC (D8), Green (RoHS & no Sb/Br)", Manufacturer="Texas Instruments", Total Supply Voltage(Max)(+5V is 5, +/-5V is 10)=36, Total Supply Voltage(Min)(+5V is 5, +/-5V is 10)=7, CMRR(Min)(dB)=70, Code_JEDEC=MS-012, ComponentLink1Description="Manufacturer URL", ComponentLink1URL=http://www.ti.com/, ComponentLink2Description=Datasheet, ComponentLink2URL=http://www.ti.com/lit/ds/symlink/ua741.pdf, ComponentLink3Description="Package Specification", ComponentLink3URL=http://www.ti.com/litv/pdf/msoi002j, DatasheetVersion=SLOS094B, Eco-Plan="Green (RoHS & no Sb/Br)", GBW(Typ)(MHz)=1, IIB(Max)(pA)=1500000, Iq per channel(Max)(mA)=2.8, Mounting Technology="Surface Mount", Number Of Channels=1, PackageDescription="8-Pin Plastic Small Outline, Body 4.9 x 3.9 mm, Pitch 1.27 mm", PackageReference=D0008A, PackageVersion="4040047-3/M, 06/2011", PartNumber=UA741CDR, Slew Rate(Typ)(V/us)=0.5, Sub Family="General Purpose Amplifier, High Supply Voltage Amplifier (>=30V)", Vio (25C)(Max)(mV)=6
U5: "No Description Available", Mfr_Name="Diodes Inc", RefDes=RefDes, Type=Type

## Via types
v1: diameter 1.27, hole 0.711, Top Layer to Bottom Layer, 2 vias

## Nets (pads, with @x,y where several pads share a name; then routed paths per layer and width w, separated by ;. In a path a pad name is that pad's centre, name@x,y a point inside that pad or via, vN(x,y) a via of type N, cw(c..) or ccw(c..) an arc to the next point about the centre after c; other vN are vias at no path point)
3.3VIN: C16.2 J1.7 P3.1 U2.5
5VIN: C3.2 C7.2 C13.1 C14.1 C15.1 C17.2 J1.15 J6.1 L1.2 R7.2 R12.1 U1.16 U2.3 U3.8 U4.7
12VENC: CR1.1 P2.1 Q1.3
12VIN: C9.1 P1.1 P6.1 Q1.2 Q3.2 R1.1 R3.1 U5.2 U5.3
12VMOTOR: CR2.1 P4.1 Q3.3
CAN_RX_3.3V: J2.25 U2.4
CAN_TX_3.3V: J2.27 U2.1
CANH: J11.1 J12.1 R9.1 U2.7
CANL: J11.2 J12.2 R9.2 U2.6
ENC: J2.30 R2.2
"ENC RX": J9.2 J10.2 U1.8
"ENC TX": J9.1 J10.1 U1.7
ENC_RX_3.3V: J2.4 U1.9
ENC_TX_3.3V: J2.6 U1.10
GND: C1.1 C2.1 C3.1 C6.2 C7.1 C8.1 C9.2 C11.2 C12.1 C13.2 C14.2 C15.2 C16.1 C17.1 CR1.2 CR2.2 D1.2 D2.2 J1.11 J1.13 J2.23 J6.2 J7.3 J8.3 J9.3 J10.3 J11.3 J12.3 P1.2 P2.2 P3.2 P4.2 P6.2 P7.1 P7.2 Q2.2 Q4.2 R5.1 R8.1 R10.1 U1.15 U2.2 U3.1 U3.4 U4.4 U5.7 U5.EPAD
"GPIO DIR": J4.2 U3.2
MOTOR-CONT: J2.29 R4.2
NetC1_2: C1.2 D1.1 Q2.1 R2.1
NetC2_2: C2.2 D2.1 Q4.1 R4.1
NetC4_1: C4.1 U1.3
NetC4_2: C4.2 U1.1
NetC5_1: C5.1 U1.5
NetC5_2: C5.2 U1.4
NetC6_1: C6.1 U1.2
NetC8_2: C8.2 U1.6
NetC10_1: C10.1 U5.1
NetC10_2: C10.2 L1.1 U5.8 | length 11.4
  Bottom Layer w0.254: v1@8.999,87.12 v1(20.447,87.12)
  other v1: 8.999,87.07
NetC11_1: C11.1 R6.2
NetC12_2: C12.2 R6.1 U5.6
NetP5_1: P5.1 R11.1
NetP5_2: P5.2 R11.2
NetQ1_1: Q1.1 Q2.3 R1.2
NetQ3_1: Q3.1 Q4.3 R3.2
NetR5_2: R5.2 U5.4
NetR7_1: R7.1 R8.2 U5.5 | length 0.1
  Top Layer w0.254: R8.2@16.016,96.876 R8.2
NetR10_2: R10.2 R12.2 U3.3
P1-8: U3.7
P1-13: U4.2 U4.6
PA5: J2.11 U4.3
"SCL P": J2.19 J7.1 J8.1
"SDA P": J2.21 J7.2 J8.2
pads on no net: J1.1 J1.2 J1.3 J1.4 J1.5 J1.6 J1.8 J1.9 J1.10 J1.12 J1.14 J1.16 J2.1 J2.2 J2.3 J2.5 J2.7 J2.8 J2.9 J2.10 J2.12 J2.13 J2.14 J2.15 J2.16 J2.17 J2.18 J2.20 J2.22 J2.24 J2.26 J2.28 J3.1 J3.2 J3.3 J3.4 J3.5 J3.6 J3.7 J3.8 J3.9 J3.10 J3.11 J3.12 J3.13 J3.14 J3.15 J3.16 J3.17 J3.18 J3.19 J3.20 J4.1 J4.3 J4.4 J4.5 J4.6 J4.7 J4.8 J4.9 J4.10 J4.11 J4.12 J4.13 J4.14 J4.15 J4.16 J4.17 J4.18 J4.19 J4.20 J4.21 J4.22 J4.23 J4.24 J4.25 J4.26 J4.27 J4.28 J4.29 J4.30 J4.31 J4.32 J4.33 J4.34 P8.1 P8.2 U1.11 U1.12 U1.13 U1.14 U2.8 U3.5 U3.6 U4.1 U4.5 U4.8

## Polygon pours and split planes (outlines as drawn)
NetC10_1 on Top Layer "NETC10_1_L01_P090" (solid, pour order 90): 20.25,91 21.25,90 21.5,90 21.5,88 22.75,88 22.75,91 21.75,92 20.25,92
NetR5_2 on Top Layer "NETR5_2_L01_P089" (solid, pour order 89): 20.25,95 21,95.75 21,98.5 22.75,98.5 22.75,95.75 21.5,94.5 20.25,94.5
12VIN on Top Layer "12VIN_L01_P088" (solid, pour order 88): 33.5,92.25 33.5,94.75 23.5,94.75 23,94.25 20.25,94.25 20.25,92.25
NetC10_2 on Top Layer "NETC10_2_L01_P086" (solid, pour order 86): 19.75,89.75 19.75,86.25 21.25,86.25 21.25,89.75
NetR7_1 on Top Layer "NETR7_1_L01_P084" (solid, pour order 84): 13.6,98 13.6,96 14.8,94.8 16.7,94.8 16.7,98
NetC12_2 on Top Layer "NETC12_2_L01_P081" (solid, pour order 81): 8.5,95.5 13.5,95.5 14.5,94.5 16.5,94.5 16.5,93.5 16.4,93.4 14.1,93.4 13,94.5 8.5,94.5
NetC11_1 on Top Layer "NETC11_1_L01_P080" (solid, pour order 80): 7.5,95.5 7.5,91.5 6,91.5 6,95.5
no net on Top Layer "NONET_L01_P079" (solid, pour order 79): 9.5,91 10,91.5
GND on Top Layer "GND_L01_P078" (solid, pour order 78): 17,89.75 15.45,88.2 15.45,78.45 24.75,78.45 24.75,91.75 23.075,91.75 23.075,85.775 19.6,85.775 19.1,86.275 19.1,89.75 19.825,90.475 19.825,95.275 20.625,96.075 20.625,98.55 17.025,98.55 17.025,93.15 13.425,93.15 13.425,93.575 13.05,93.95 11.05,93.95 10.65,93.55 10.65,93.15 8.65,93.15 8.5,93 8.5,91.5 9,91 12.5,91 13.8,92.3 17,92.3
5VIN on Top Layer "5VIN_L01_P076" (solid, pour order 76): 13,98 13,96 3,96 2.5,95.5 2.5,84 3,83.5 11.5,83.5 14,86 14.5,86 15,85.5 15,79 14.5,78.5 2,78.5 1,79.5 1,97 2,98
NetC10_2 on Top Layer "NETC10_2_L01_P075" (solid, pour order 75): 13.5,90.5 15,92 16.5,92 16.5,91 11,85.5 4,85.5 4,90.5

## Text inside footprints (layer, text, board x,y; h text height)
CR1: Top 3D Body "*" at 12.635,41.062 h1.27 r90; Top Overlay "*" at 12.635,39.596 h1.27 r90
CR2: Top 3D Body "*" at 59.562,86.865 h1.27; Top Overlay "*" at 58.096,86.865 h1.27
U5: Top 3D Body "*" at 20.307,92.086 h1.27 r180; Top Overlay "*" at 20,92.25 h1.27 r180